# Altium PCB 88E1512_1000M_SFP_1027.PcbDoc (part 1 of 2)
Units mm, origin at the board's own origin, x right, y up, seen from the top; angles counter-clockwise.
Board outline 50 x 100 mm, 2 copper layers (Top Layer, Bottom Layer); 170 components, 153 nets, 597 pads, 463 vias.
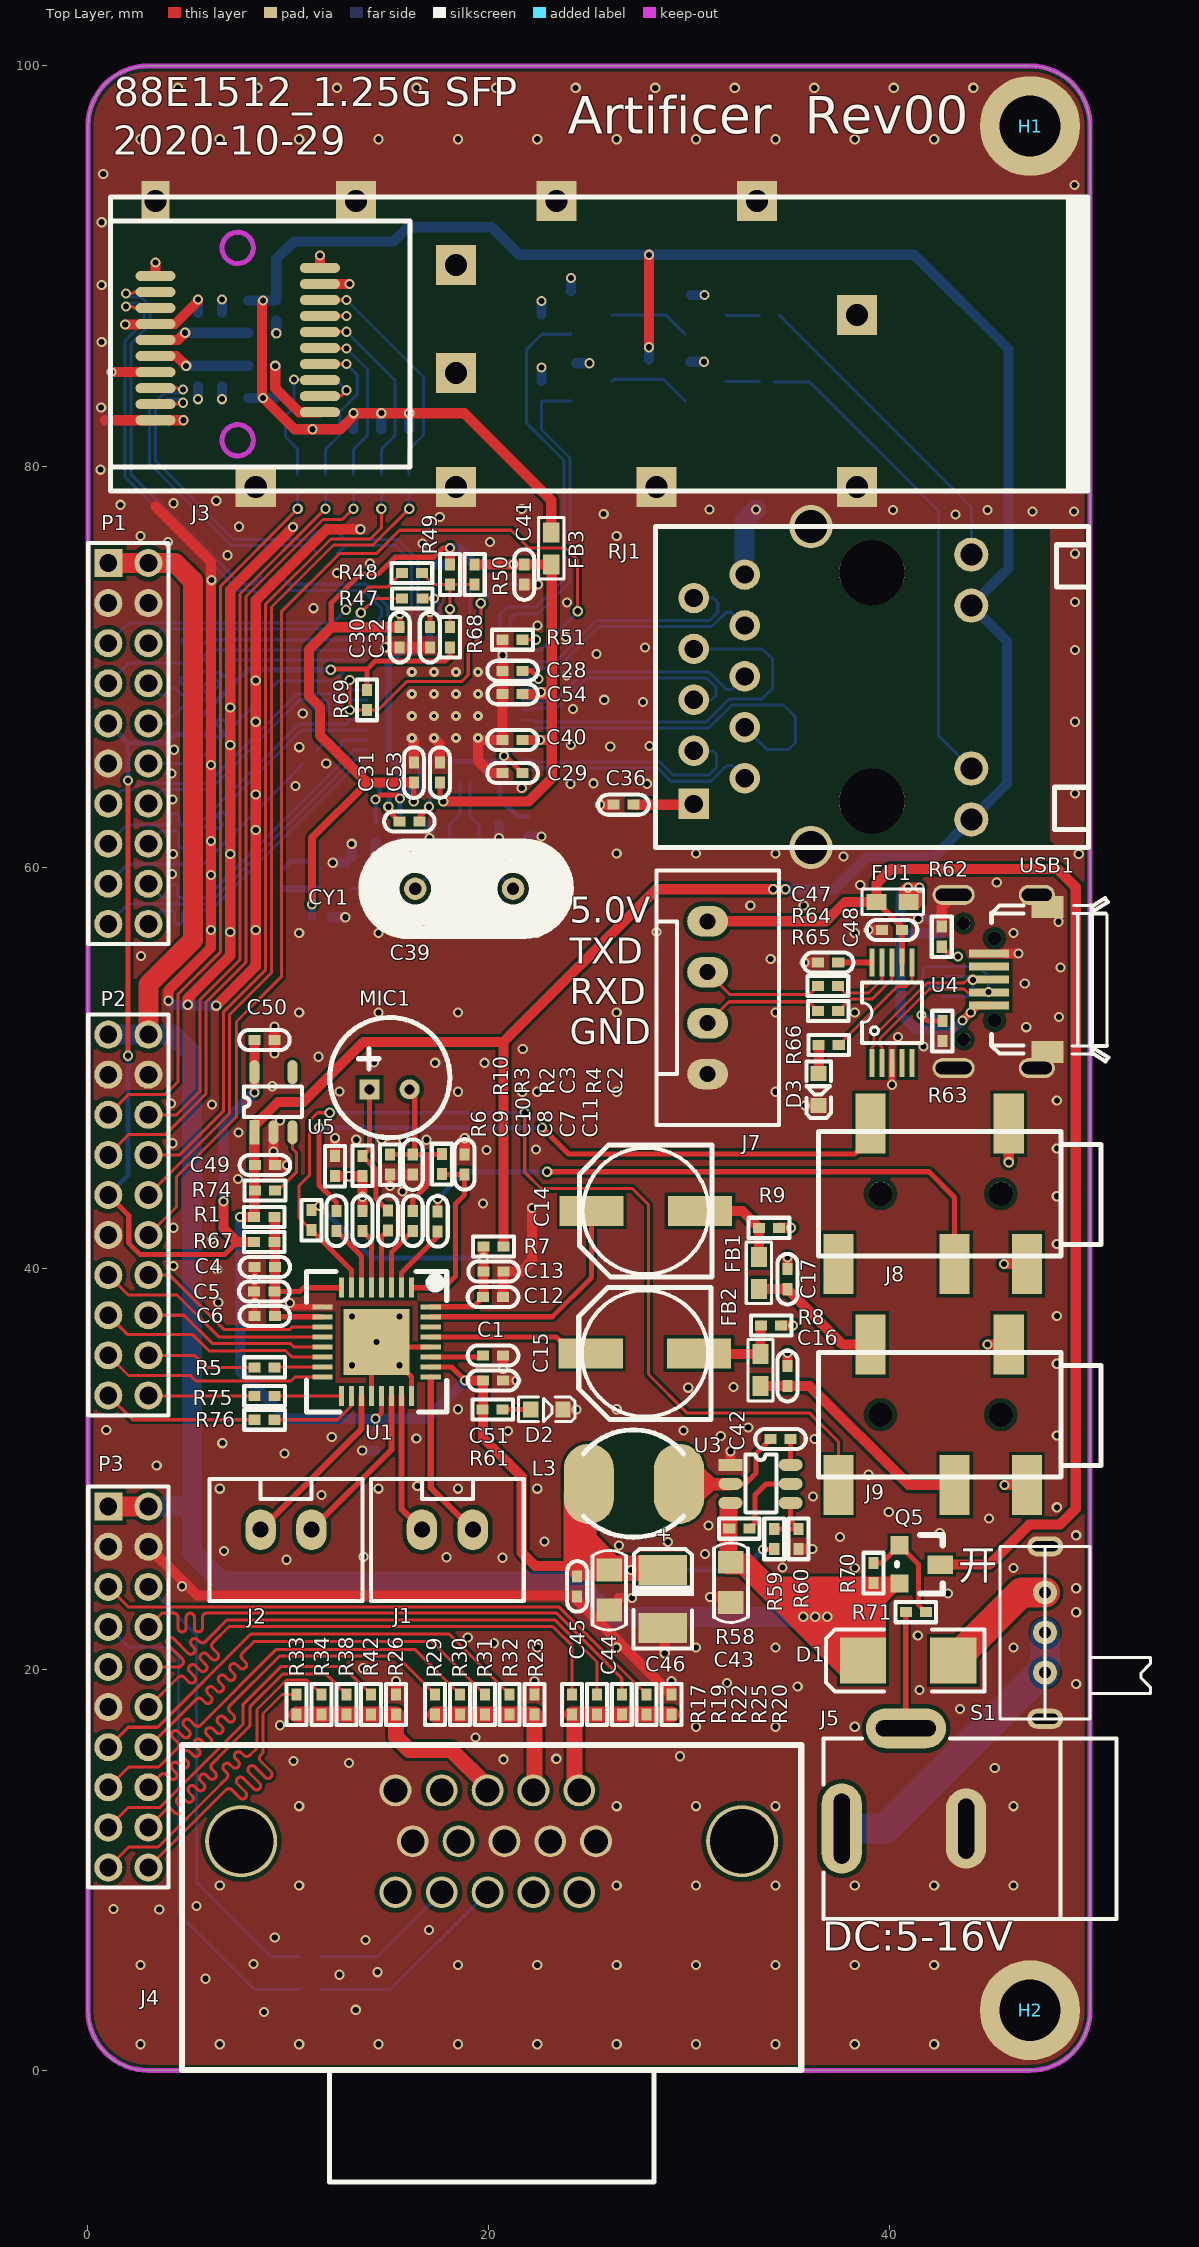
[diagram p0: Top Layer view]
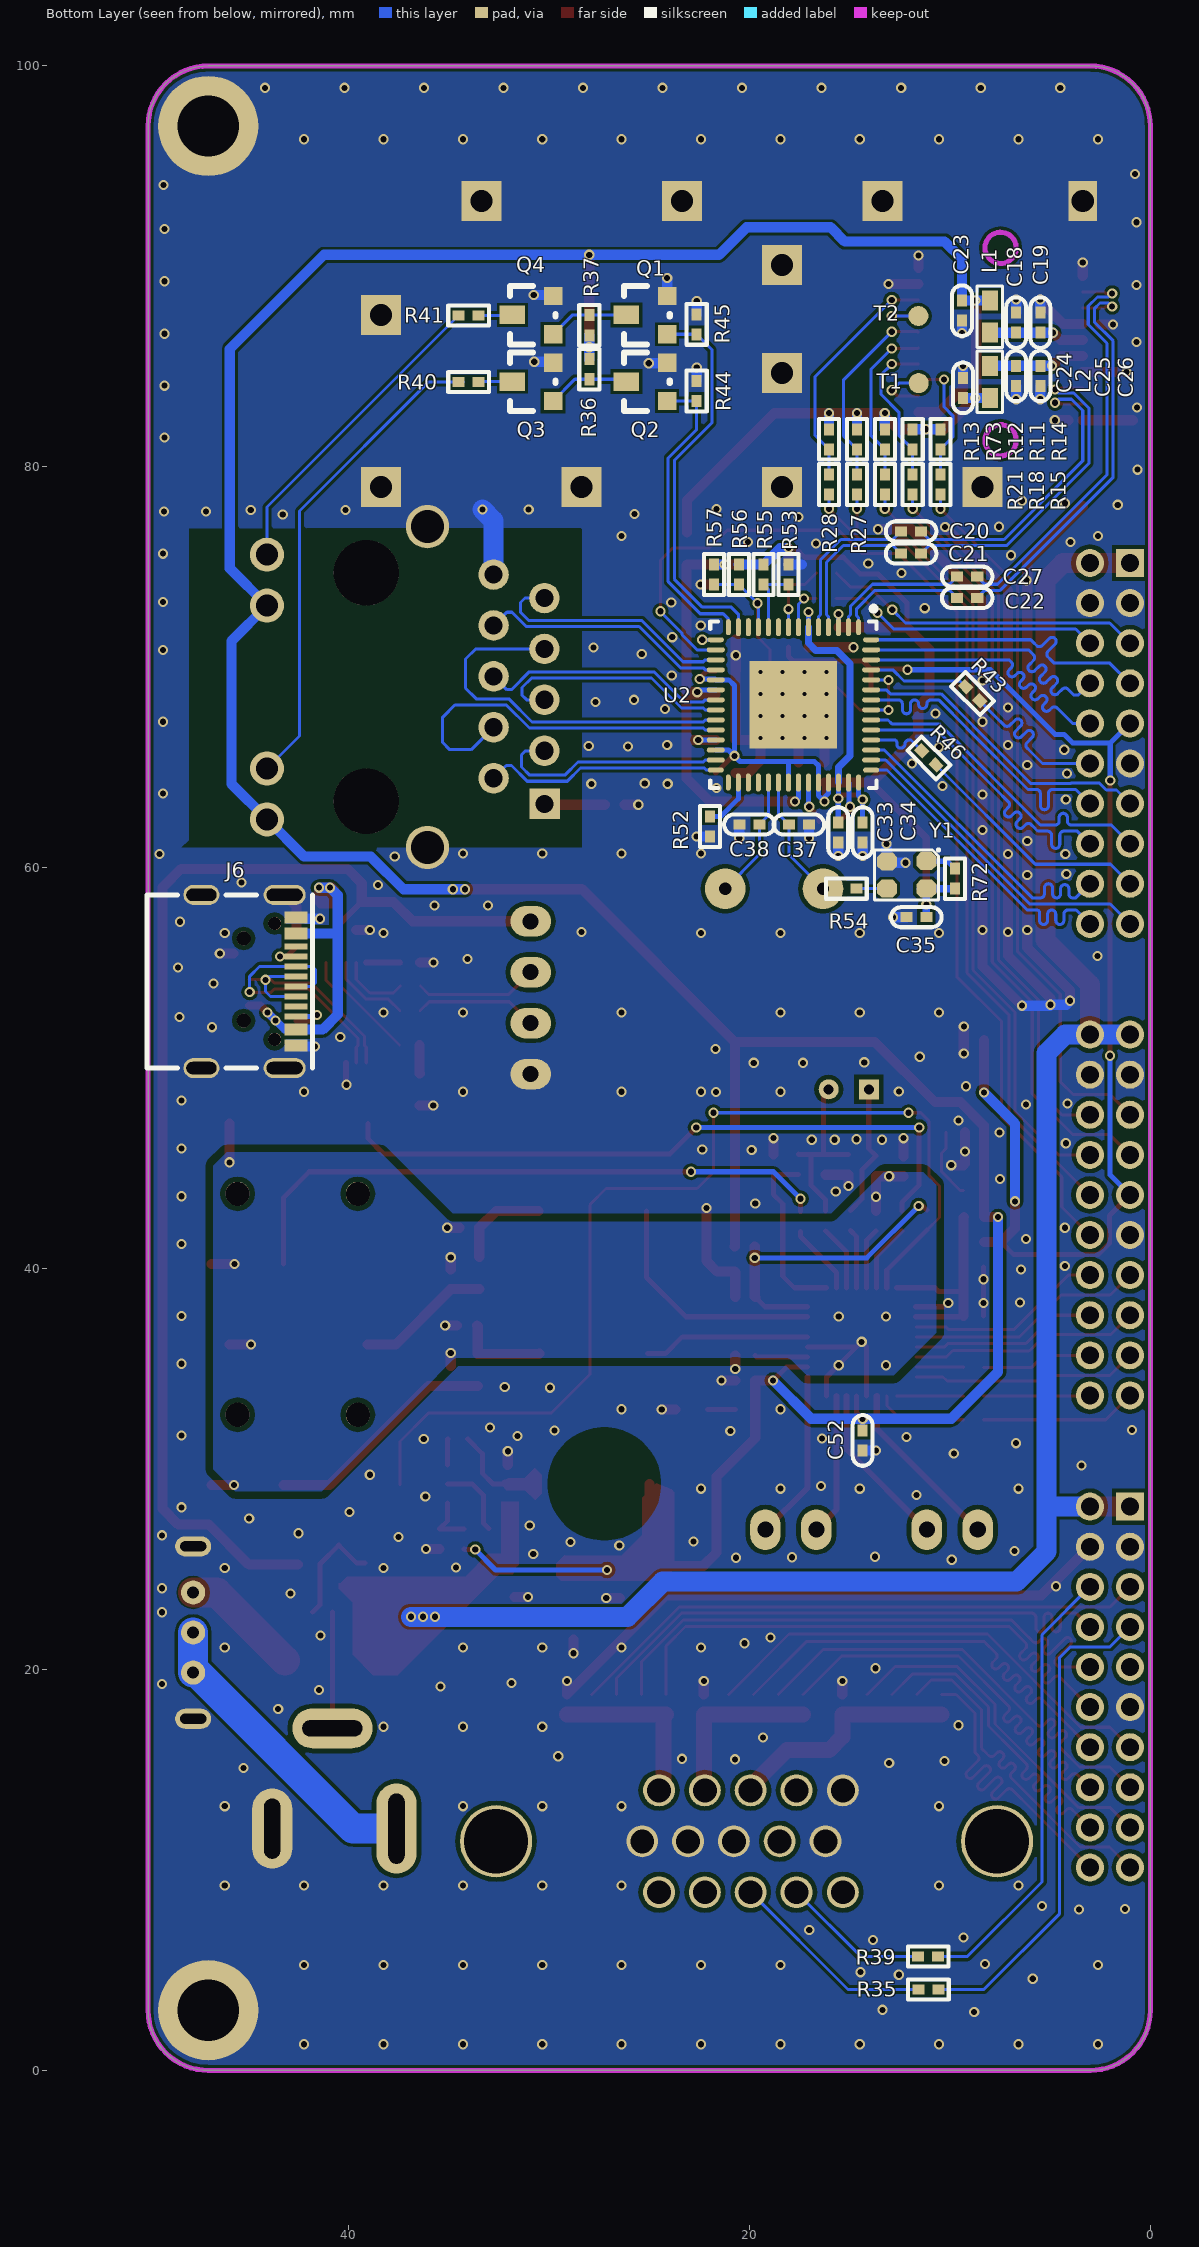
[diagram p1: Bottom Layer view, seen from below]
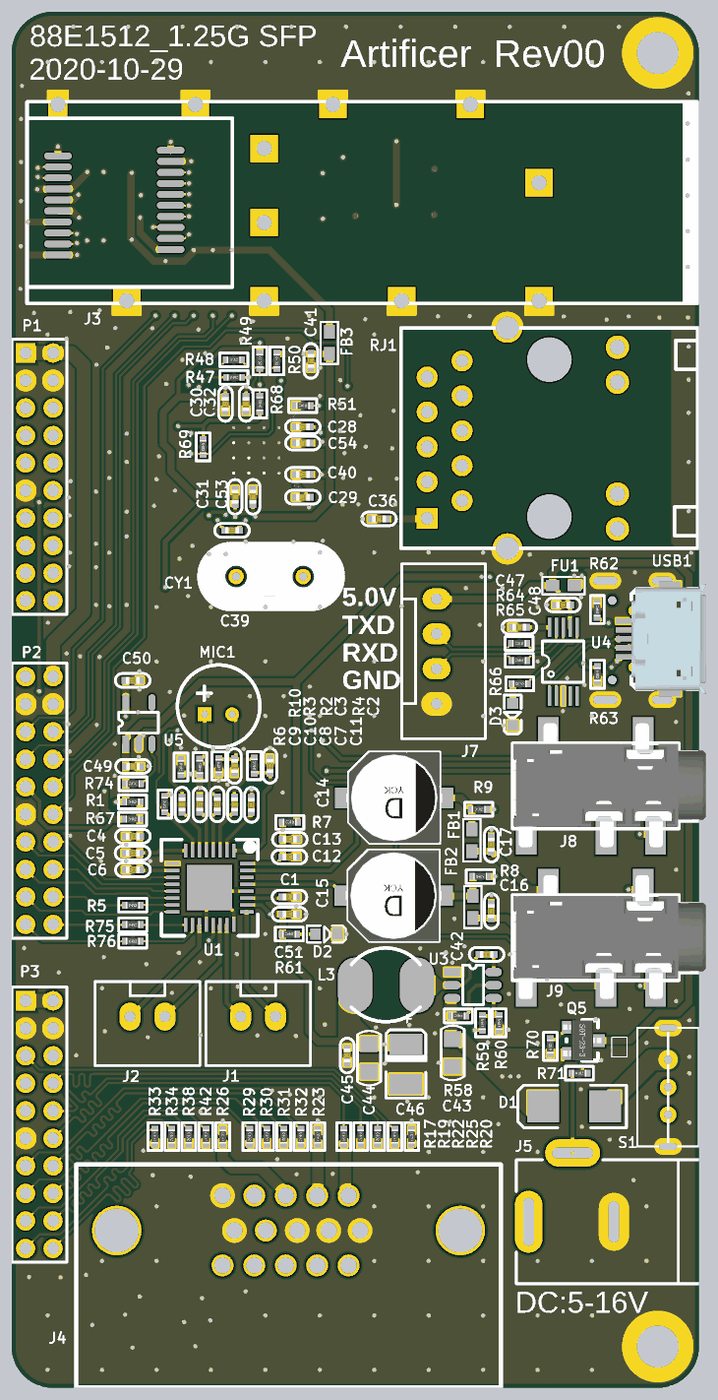
[diagram p3: 3D render of the assembled board from above, using the file's embedded part models]
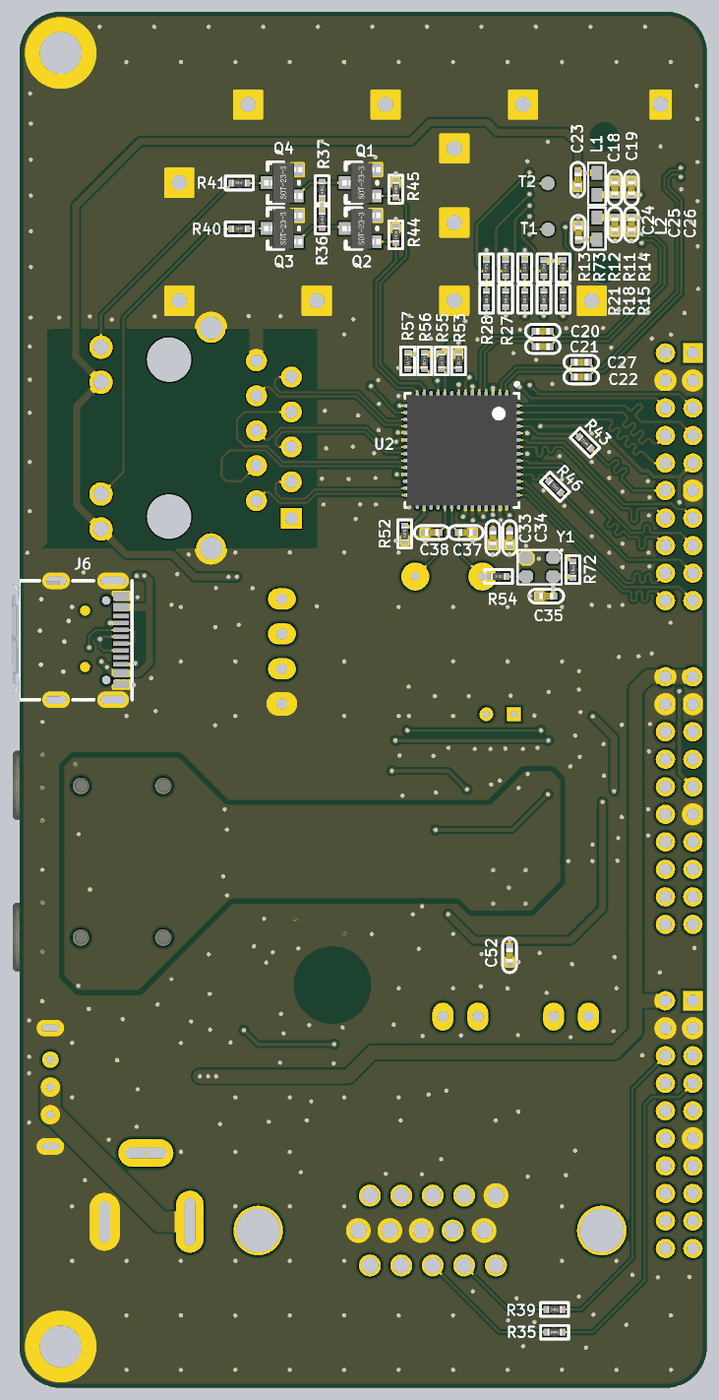
[diagram p4: 3D render of the assembled board from below, using the file's embedded part models]

## Layer stack, top to bottom
Top Solder: solder mask 0.0102, Solder Resist, Dk 3.5
Top Layer: signal copper 0.0356
Dielectric 1: dielectric 0.32, FR-4, Dk 4.8
Bottom Layer: signal copper 0.0356
Bottom Solder: solder mask 0.0102, Solder Resist, Dk 3.5

## Board outline
0,3 ccw(c3,3) 3,0 47,0 ccw(c47,3) 50,3 50,97 ccw(c47,97) 47,100 3,100 ccw(c3,97) 0,97

## Design rules (kind name [scope] priority, off if disabled: settings)
Clearance [All] p1: gap=0.152 except(0.22: THPad-Poly; 0.381: Poly-Poly)
ComponentClearance [All] p1 off: gap=0.254 collisioncheckmode=3 verticalgap=0.254 showdistances=FALSE
DiffPairsRouting [All] p1: maxlimit=0.152 minlimit=0.152 mostfreqgap=0.152 toplayer_minwidth=0.152 toplayer_maxwidth=0.152 toplayer_prefwidth=0.152 bottomlayer_minwidth=0.152 bottomlayer_maxwidth=0.152 bottomlayer_prefwidth=0.152 maxuncoupledlength=12.7
HoleSize [All] p1: absolutevalues=TRUE maxlimit=3.5 minlimit=0.025 maxpercent=80.000 minpercent=20.000
HoleToHoleClearance [All] p1: gap=0.152 allowstackedmicrovias=TRUE
MinimumSolderMaskSliver [All] p1 off: minsoldermaskwidth=0.254
PolygonConnect PolygonConnect_GND [IsVia or InNet('GND')] p1: connectstyle=Direct reliefconductorwidth=0.254 reliefentries=4 polygonreliefangle="90 Angle" airgapwidth=0.254
PolygonConnect [All] p2: connectstyle=Relief reliefconductorwidth=0.254 reliefentries=4 polygonreliefangle="90 Angle" airgapwidth=0.254
RoutingVias [All] p1: holewidth=0.305 width=0.508 viastyle="Through Hole" minholewidth=0.305 minwidth=0.508 maxholewidth=0.711 maxwidth=1.27
SilkToSilkClearance [All] p1 off: silktosilkclearance=0.254
SilkToSolderMaskClearance [IsPad] p1 off: minsilkscreentomaskgap=0.254 clearancetoexposedcopper=TRUE
SolderMaskExpansion [All] p1: expansion=0.102
Width [All] p1: maxlimit=3 minlimit=0.152 preferedwidth=0.152
23 further rules are at their usual default settings.

## Classes and differential pairs
net class eth_rxdata: ETH_RX_CLK ETH_RX_CTRL ETH_RXD0 ETH_RXD1 ETH_RXD2 ETH_RXD3
net class eth_txdata: ETH_TX_CLK ETH_TX_CTRL ETH_TXD0 ETH_TXD1 ETH_TXD2 ETH_TXD3
component class Power: C42 C43 C44 C45 C46 C47 C48 C49 C50 D1 D2 D3 FU1 H1 H2 J5 J6 J7 L3 Q5 R58 R59 R60 R61 R62 R63 R64 R65 R66 R70 R71 R74 S1 U3 U4 U5 USB1
component class 88E1512_1000M_SFP: C1 C2 C3 C4 C5 C6 C7 C8 C9 C10 C11 C12 C13 C14 C15 C16 C17 C18 C19 C20 C21 C22 C23 C24 C25 C26 C27 C28 C29 C30 C31 C32 C33 C34 C35 C36 C37 C38 C39 C40 C41 C51 C52 C53 C54 CY1 FB1 FB2 FB3 J1 J2 J3 J4 J8 J9 L1 L2 LINE_IN? MIC1 P1 P2 P3 Q1 Q2 Q3 Q4 R1 R2 R3 R4 R5 R6 R7 R8 R9 R10 R11 R12 R13 R14 R15 R17 R18 R19 R20 R21 R22 R23 R25 R26 R27 R28 R29 R30 R31 R32 R33 R34 R35 R36 R37 R38 R39 R40 R41 R42 R43 R44 R45 R46 R47 R48 R49 R50 R51 R52 R53 R54 R55 R56 R57 R67 R68 R69 R72 R73 R75 R76 RJ1 T1 T2 U1 U2 Y1
net class vga_r: VGA_R1 VGA_R2 VGA_R3 VGA_R4
net class vga_g: VGA_G1 VGA_G2 VGA_G3 VGA_G4
net class vga_b: VGA_B1 VGA_B2 VGA_B3 VGA_B4
differential pair USB_UART: +USB_UART_P -USB_UART_N
differential pair S_OUT: +S_OUT_P -S_OUT_N
differential pair S_IN: +S_IN_P -S_IN_N
differential pair ETH_MD4: +ETH_MD4_P -ETH_MD4_N
differential pair ETH_MD3: +ETH_MD3_P -ETH_MD3_N
differential pair ETH_MD2: +ETH_MD2_P -ETH_MD2_N
differential pair ETH_MD1: +ETH_MD1_P -ETH_MD1_N
differential pair SIN: +SIN_P -SIN_N
differential pair SOUT: +SOUT_P -SOUT_N

## Components (designator, comment, footprint, x,y, rotation, side; value= is the part's Value field where it differs from the comment)
C1 "CC41-0603-22pF" 0402C 20.21,35.662 r0 top
C2 "CC41-0603-22pF" 0402C 18.796,45.204 r90 top
C3 "CC41-0603-22pF" 0402C 16.205,45.187 r270 top
C4 "10uF" 0402C 8.822,40.081 r0 top
C5 "CC41-0603-22pF" 0402C 8.796,38.862 r0 top
C6 "CC41-0603-22pF" 0402C 8.822,37.643 r0 top
C7 "CC41-0603-22pF" 0402C 16.205,42.385 r270 top
C8 "CC41-0603-22pF" 0402C 14.961,42.401 r270 top
C9 "CC41-0603-22pF" 0402C 12.395,42.385 r270 top
C10 "CC41-0603-22pF" 0402C 13.691,42.385 r270 top
C11 "CC41-0603-22pF" 0402C 17.45,42.359 r270 top
C12 "CC41-0603-22pF" 0402C 20.21,38.583 r180 top
C13 "CC41-0603-22pF" 0402C 20.236,39.853 r180 top
C14 "220uF" "CM D(6.3*5.4)" 27.831,42.875 r180 top
C15 "220uF" "CM D(6.3*5.4)" 27.788,35.763 r180 top
C16 "CC41-0603-22pF" 0402C 34.9,34.638 r270 top
C17 "CC41-0603-22pF" 0402C 34.9,39.472 r270 top
C18 "CC41-0603-22pF" 0402C 6.694,87.19 r270 bottom
C19 "CC41-0603-22pF" 0402C 5.491,87.19 r270 bottom
C20 "10nF" 0402C 11.938,76.784 r180 bottom
C21 "10nF" 0402C 11.938,75.667 r180 bottom
C22 "10nF" 0402C 9.136,73.457 r180 bottom
C23 "CC41-0603-22pF" 0402C 9.398,87.79 r90 bottom
C24 "CC41-0603-22pF" 0402C 9.347,83.939 r270 bottom
C25 "CC41-0603-22pF" 0402C 6.694,84.539 r90 bottom
C26 "CC41-0603-22pF" 0402C 5.491,84.539 r90 bottom
C27 "10nF" 0402C 9.136,74.524 r180 bottom
C28 "CC41-0603-22pF" 0402C 21.184,69.825 r0 top
C29 "CC41-0603-22pF" 0402C 21.184,64.719 r0 top
C30 "CC41-0603-22pF" 0402C 15.555,71.498 r90 top
C31 "CC41-0603-22pF" 0402C 16.256,64.745 r270 top
C32 "CC41-0603-22pF" 0402C 17.055,71.498 r90 top
C33 "CC41-0603-22pF" 0402C 15.57,61.755 r90 bottom
C34 "CC41-0603-22pF" 0402C 14.351,61.755 r90 bottom
C35 "CC41-0603-22pF" 0402C 11.676,57.531 r0 bottom
C36 "CC41-0603-22pF" 0402C 26.721,63.144 r180 top
C37 "CC41-0603-22pF" 0402C 17.534,62.154 r0 bottom
C38 "CC41-0603-22pF" 0402C 20.007,62.154 r180 bottom
C39 "CC41-0603-22pF" 0402C 16.035,62.306 r180 top
C40 "CC41-0603-22pF" 0402C 21.18,66.373 r0 top
C41 "CC41-0603-22pF" 0402C 21.768,74.625 r90 top
C42 "0.1uF" 0402C 34.552,31.496 r180 top
C43 "22uF" 0805C 32.08,25.349 r270 top
C44 "22uF" 0805C 26.01,24.968 r270 top
C45 "0.1uF" 0402C 24.409,24.147 r90 top
C46 "100uF/6.3V" 3528C 28.677,22.073 r90 top
C47 "0.1uF/16V" 0402C 36.932,55.27 r180 top
C48 "0.1uF/16V" 0402C 40.115,56.896 r0 top
C49 "10uF/6.3V" 0402C 8.831,45.161 r0 top
C50 "1uF/6.3V" 0402C 8.806,51.41 r0 top
C51 "CC41-0603-22pF" 0402C 20.21,34.417 r180 top
C52 "CC41-0603-22pF" 0402C 14.351,31.428 r90 bottom
C53 "CC41-0603-22pF" 0402C 17.555,64.748 r270 top
C54 "CC41-0603-22pF" 0402C 21.192,68.656 r0 top
CY1 "25MHz" HC-49S 21.234,58.928 r180 top locked
D1 "SS34" SMB 40.919,20.447 r180 top
D2 "LED_R" LED-0603 22.098,32.999 r0 top
D3 "LED_R" LED-0603 36.479,49.733 r270 top
FB1 "120R" 0603R 33.477,40.589 r270 top
FB2 "120R" 0603R 33.553,35.738 r270 top
FB3 "120R_3A" 0603R 23.114,75.133 r90 top
FU1 "5V/1A" 0603 40.945,58.293 r180 top
H1 "Hose" HOSE 47,97 r0 top locked
H2 "Hose" HOSE 47,3 r0 top locked
J1 "XH-2P" DG1282 21.742,36.119 r180 top
J2 "XH-2P" DG1282 13.691,36.119 r180 top
J3 "1.25G_SFP_1X1" 1.25G_SFP_1X1 38.372,78.994 r180 top locked
J4 "VGA" VGA 20.142,11.43 r0 top locked
J5 "PWR2.5" pw2.5 51.308,12.065 r180 top
J6 "TYPE-C16PIN" USB-C-SMD_TYPE-C16PIN 44.976,54.325 r270 bottom locked
J7 "XH-4P" DG1284 31.42,59.868 r270 top
J8 "PJ-327A" PJ327A 48.538,43.734 r180 top
J9 "PJ-327A" PJ327A 48.538,32.71 r180 top
L1 "1.2uH" 0603R 8.001,88.29 r270 bottom
L2 "1.2uH" 0603R 8.001,83.439 r90 bottom
L3 "4.7uH/2A" CD54 25.053,29.353 r0 top
MIC1 "MIC" MIC-6022 14.046,48.946 r0 top
P1 "HERDER 10X2" HDR2X10_2.0#1 1.016,75.2 r270 top locked
P2 "HERDER 10X2" HDR2X10_2.0#2 1.016,51.675 r270 top locked
P3 "HERDER 10X2" HDR2X10_2.0#1 1.016,28.125 r270 top locked
Q1 "AO3400" SOT23 25.121,87.566 r90 bottom
Q2 "AO3400" SOT23 25.121,84.239 r90 bottom
Q3 "AO3400" SOT23 30.81,84.239 r90 bottom
Q4 "AO3400" SOT23 30.81,87.566 r90 bottom
Q5 "AO3400" SOT23 41.504,25.248 r270 top
R1 "NC_33R" 0402R 8.796,42.57 r180 top
R2 "47K" 0402R 15.062,45.187 r90 top
R3 "0R" 0402R 13.691,45.128 r270 top
R4 "680R" 0402R 17.653,45.212 r270 top
R5 "33R" 0402R 8.814,35.077 r180 top
R6 "47K" 0402R 11.151,42.418 r90 top
R7 "33R" 0402R 20.236,41.097 r0 top
R8 "10K" 0402R 34.087,37.16 r180 top
R9 "10K" 0402R 33.977,42.037 r180 top
R10 "0R" 0402R 12.319,45.11 r90 top
R11 "10K" 0402R 11.855,81.374 r90 bottom
R12 "10K" 0402R 13.246,81.374 r90 bottom
R13 "10K" 0402R 16.027,81.374 r90 bottom
R14 "10K" 0402R 10.465,81.374 r90 bottom
R15 "33R" 0402R 10.465,79.121 r270 bottom
R17 "4K_1%" 0402R 24.155,18.255 r90 top
R18 "33R" 0402R 11.855,79.121 r270 bottom
R19 "2K_1%" 0402R 25.394,18.255 r90 top
R20 "75R_1%" 0402R 29.108,18.255 r270 top
R21 "33R" 0402R 13.246,79.121 r270 bottom
R22 "1K_1%" 0402R 26.632,18.255 r90 top
R23 "75R_1%" 0402R 22.276,18.255 r270 top
R25 "510R_1%" 0402R 27.87,18.255 r90 top
R26 "75R_1%" 0402R 15.367,18.255 r270 top
R27 "33R" 0402R 14.637,79.121 r270 bottom
R28 "33R" 0402R 16.027,79.121 r270 bottom
R29 "4K_1%" 0402R 17.323,18.255 r90 top
R30 "2K_1%" 0402R 18.561,18.255 r90 top
R31 "1K_1%" 0402R 19.799,18.255 r90 top
R32 "510R_1%" 0402R 21.038,18.255 r90 top
R33 "4K_1%" 0402R 10.414,18.255 r90 top
R34 "2K_1%" 0402R 11.652,18.255 r90 top
R35 "100R_1%" 0402R 11.074,4.039 r0 bottom
R36 "1K" 0402R 27.991,84.869 r90 bottom
R37 "1K" 0402R 27.991,87.063 r270 bottom
R38 "1K_1%" 0402R 12.89,18.255 r90 top
R39 "100R_1%" 0402R 11.082,5.69 r0 bottom
R40 "470R" 0402R 34.011,84.226 r180 bottom
R41 "470R" 0402R 34.011,87.554 r180 bottom
R42 "510R_1%" 0402R 14.129,18.255 r90 top
R43 "33R" 0402R 8.865,68.682 r225 bottom
R44 "1K" 0402R 22.631,83.787 r270 bottom
R45 "1K" 0402R 22.631,87.105 r270 bottom
R46 "33R" 0402R 11.049,65.481 r225 bottom
R47 "33R" 0402R 16.18,73.431 r180 top
R48 "33R" 0402R 16.162,74.701 r180 top
R49 "NC_4.99K_1%" 0402R 18.059,74.625 r90 top
R50 "NC_4.99K_1%" 0402R 19.296,74.625 r90 top
R51 "0R" 0402R 21.18,71.373 r0 top
R52 "4.99K_1%" 0402R 21.971,62.06 r90 bottom
R53 "0R" 0402R 18.059,74.625 r90 bottom
R54 "NC_40.2R_1%" 0402R 15.164,58.953 r0 bottom
R55 "NC_0R" 0402R 19.296,74.625 r90 bottom
R56 "NC_0R" 0402R 20.532,74.625 r90 bottom
R57 "NC_0R" 0402R 21.768,74.625 r90 bottom
R58 "100K" 0402R 32.495,27.026 r0 top
R59 "62.5K_1%" 0402R 34.239,26.518 r90 top
R60 "20K_1%" 0402R 35.458,26.518 r90 top
R61 "470R" 0402R 20.193,32.969 r0 top
R62 "4.7K/5%" 0402R 42.596,56.558 r270 top
R63 "4.7K/5%" 0402R 42.621,51.849 r90 top
R64 "33R/5%" 0402R 36.914,54.102 r0 top
R65 "33R/5%" 0402R 36.932,52.857 r0 top
R66 "2K/5%" 0402R 36.957,51.156 r0 top
R67 "33R" 0402R 8.796,41.326 r180 top
R68 "4.99K_1%" 0402R 18.055,71.498 r270 top
R69 "0R" 0402R 13.93,68.373 r90 top
R70 "100K/5%" 0402R 39.192,24.808 r270 top
R71 "0R/5%" 0402R 41.3,22.86 r180 top
R72 "NC_22K" 0402R 9.754,59.453 r270 bottom
R73 "10K" 0402R 14.637,81.374 r90 bottom
R74 "100K/5%" 0402R 8.831,43.891 r0 top
R75 "33R" 0402R 8.814,33.655 r180 top
R76 "33R" 0402R 8.814,32.461 r180 top
RJ1 "HR911130A" RJ45-TH_HR911130A 37.144,69.014 r270 top locked
S1 "SW_SK12D07VG4" SW_SK12D07VG3 50.002,17.544 r90 top
T1 "TEST" TEST 11.557,84.176 r270 bottom
T2 "TEST" TEST 11.572,87.524 r270 bottom
U1 "WM8960" QFN32_W8960 14.402,36.347 r270 top
U2 "88E1512-XX-NNP2" 88E1512_QFN56 17.805,68.123 r270 bottom locked
U3 "JW5033S" SOT-23-6 32.055,30.211 r0 top
U4 "CH340E" MSOP10 40.005,52.807 r90 top locked
U5 "SPX3819M5-L-2-5" SOT-23-5 8.304,46.752 r90 top
USB1 "USB5PIN" MICROUSB 46.554,54.425 r270 top locked
Y1 "NC_25MHz_1.8V" 3225 10.566,60.884 r0 bottom

## Footprints (in the part's own frame and the unit in brackets; to place one, negate y for a bottom-side part, rotate by r counter-clockwise, add the part's x,y. Pads: shape width x height; smd on the part's side, far side on the other; paste and mask are expansions set on the pad)
1.25G_SFP_1X1 [mm]
  rect 2x2 hole 1.1: 0(0,0) 0(0,-8.58) 0(5,-14.26) 0(10,0) 0(15,-14.26) 0(20,-11.07) 0(20,-5.68) 0(20,0) 0(25,-14.26) 0(30,0)
  rect 1.4x2 hole 1.1: 0(35,-14.26)
  oval 2x0.5 smd: 1(26.8,-3.73) 2(26.8,-4.53) 3(26.8,-5.33) 4(26.8,-6.13) 5(26.8,-6.93) 6(26.8,-7.73) 7(26.8,-8.53) 8(26.8,-9.33) 9(26.8,-10.13) 10(26.8,-10.93) 11(35,-10.53) 12(35,-9.73) 13(35,-8.93) 14(35,-8.13) 15(35,-7.33) 16(35,-6.53) 17(35,-5.73) 18(35,-4.93) 19(35,-4.13) 20(35,-3.33)
  Keep-Out Layer circle w0.254: c30.9,-2.33 r0.78
  Keep-Out Layer circle w0.254: c30.9,-11.93 r0.78
  silkscreen extent -11.5,-14.55 37.25,0.2
88E1512_QFN56 [mm] "QFN, 56-Leads, Body 8.00x8.00mm, Pitch 0.50mm, Thermal Pad 4.37x4.37mm, IPC Medium Density"
  oval 0.8x0.25 smd: 1(-3.875,3.25) 14(-3.875,-3.25) 29(3.875,-3.25) 42(3.875,3.25)
  oval 0.9x0.25 smd: 2(-3.875,2.75) 3(-3.875,2.25) 4(-3.875,1.75) 5(-3.875,1.25) 6(-3.875,0.75) 7(-3.875,0.25) 8(-3.875,-0.25) 9(-3.875,-0.75) 10(-3.875,-1.25) 11(-3.875,-1.75) 12(-3.875,-2.25) 13(-3.875,-2.75) 30(3.875,-2.75) 31(3.875,-2.25) 32(3.875,-1.75) 33(3.875,-1.25) 34(3.875,-0.75) 35(3.875,-0.25) 36(3.875,0.25) 37(3.875,0.75) 38(3.875,1.25) 39(3.875,1.75) 40(3.875,2.25) 41(3.875,2.75)
  oval 0.25x0.8 smd: 15(-3.25,-3.875) 28(3.25,-3.875) 43(3.25,3.875) 56(-3.25,3.875)
  oval 0.25x0.9 smd: 16(-2.75,-3.875) 17(-2.25,-3.875) 18(-1.75,-3.875) 19(-1.25,-3.875) 20(-0.75,-3.875) 21(-0.25,-3.875) 22(0.25,-3.875) 23(0.75,-3.875) 24(1.25,-3.875) 25(1.75,-3.875) 26(2.25,-3.875) 27(2.75,-3.875) 44(2.75,3.875) 45(2.25,3.875) 46(1.75,3.875) 47(1.25,3.875) 48(0.75,3.875) 49(0.25,3.875) 50(-0.25,3.875) 51(-0.75,3.875) 52(-1.25,3.875) 53(-1.75,3.875) 54(-2.25,3.875) 55(-2.75,3.875)
  rect 4.37x4.37 smd: 57(0,0)
  silkscreen extent -4.92,-4.15 4.15,4.15, body extent -4.02,-4.02 4.02,4.02, height 0.85
0402C [mm]
  rect 0.6x0.5 smd: 1(-0.5,0) 2(0.5,0)
  silkscreen extent -1.26,-0.5 1.26,0.5, body extent -0.5,-0.25 0.5,0.25, height 0.5
0402R [mm]
  rect 0.6x0.5 smd: 1(-0.5,0) 2(0.5,0)
  silkscreen extent -1.02,-0.5 1.02,0.5, body extent -0.5,-0.25 0.5,0.25, height 0.35
0603 [mm]
  rect 1x0.8 smd: 1(0,0) 2(1.6,0)
  silkscreen extent -0.74,-0.64 2.34,0.64
0603R [mm]
  rect 1x0.8 smd: 1(0,0) 2(1.6,0)
  silkscreen extent -0.74,-0.64 2.34,0.64
0805C [mm]
  rect 1.14x1.27 smd: 1(0,0) 2(2,0)
  silkscreen extent -0.97,-0.84 3,0.84
3225 [mm]
  oct 1x0.9 smd: 1(0.61,0.559) 2(2.565,0.584) 3(2.565,1.93) 4(0.61,1.93)
  silkscreen extent -0.06,-0.06 3.2,2.5
3528C [mm]
  rect 1.5x2.4 smd: 1(2.9,0) 2(0,0)
  silkscreen extent -1.02,-1.55 3.94,1.52
CD54 [mm]
  oval 2.5x4 smd: 1(-0.063,-0.092) 2(4.437,-0.092)
  Top Layer pour cut-out: 5.009,-0.092 5.009,0.092 4.96,0.459 4.865,0.817 4.723,1.158 4.538,1.479 4.313,1.772 4.051,2.034 3.758,2.259 3.438,2.444 3.096,2.585 2.738,2.681 2.372,2.729 2.187,2.729 2.002,2.729 1.635,2.681 1.278,2.585 0.936,2.444 0.616,2.259 0.322,2.034 0.061,1.772 -0.164,1.479 -0.349,1.158 -0.491,0.817 -0.587,0.459 -0.635,0.092 -0.635,-0.092 -0.635,-0.277 -0.587,-0.644 -0.491,-1.001 -0.349,-1.343 -0.164,-1.664 0.061,-1.957 0.322,-2.219 0.616,-2.444 0.936,-2.629 1.278,-2.77 1.635,-2.866 2.002,-2.914 2.187,-2.914 2.372,-2.914 2.738,-2.866 3.096,-2.77 3.438,-2.629 3.758,-2.444 4.051,-2.219 4.313,-1.957 4.538,-1.664 4.723,-1.343 4.865,-1.001 4.96,-0.644 5.009,-0.277 5.009,-0.092
  Bottom Layer pour cut-out: 5.009,-0.092 5.009,0.092 4.96,0.459 4.865,0.817 4.723,1.158 4.538,1.479 4.313,1.772 4.051,2.034 3.758,2.259 3.438,2.444 3.096,2.585 2.738,2.681 2.372,2.729 2.187,2.729 2.002,2.729 1.635,2.681 1.278,2.585 0.936,2.444 0.616,2.259 0.322,2.034 0.061,1.772 -0.164,1.479 -0.349,1.158 -0.491,0.817 -0.587,0.459 -0.635,0.092 -0.635,-0.092 -0.635,-0.277 -0.587,-0.644 -0.491,-1.001 -0.349,-1.343 -0.164,-1.664 0.061,-1.957 0.322,-2.219 0.616,-2.444 0.936,-2.629 1.278,-2.77 1.635,-2.866 2.002,-2.914 2.187,-2.914 2.372,-2.914 2.738,-2.866 3.096,-2.77 3.438,-2.629 3.758,-2.444 4.051,-2.219 4.313,-1.957 4.538,-1.664 4.723,-1.343 4.865,-1.001 4.96,-0.644 5.009,-0.277 5.009,-0.092
  silkscreen extent -0.34,-2.76 4.67,2.61
"CM D(6.3*5.4)" [mm]
  rect 3.2x1.5 smd: 1(2.7,0) 2(-2.7,0)
  silkscreen extent -3.3,-3.3 3.3,3.3, body extent -3.5,-3.3 3.5,3.3, height 5.4
DG1282 [mil]
  oval 60x80 hole 31.5: 1(100,360) 2(200,360)
  silkscreen extent 0,260 300,500
DG1284 [mil]
  oval 60x80 hole 31.5: 1(100,-20) 2(200,-20) 3(300,-20) 4(400,-20)
  silkscreen extent 0,-120 500,120
HC-49S [mil]
  round 44 / inner round 100 / far side round 80 hole 24: 1(1,-1) 2(193,-1)
  silkscreen extent -115,-96 301,94
HDR2X10_2.0#1 [mm]
  rect 1.4x1.4 hole 0.889: 1(0,0)
  round 1.4 hole 0.889: 2(0,2) 3(2,0) 4(2,2) 5(4,0) 6(4,2) 7(6,0) 8(6,2) 9(8,0) 10(8,2) 11(10,0) 12(10,2) 13(12,0) 14(12,2) 15(14,0) 16(14,2) 17(16,0) 18(16,2) 19(18,0) 20(18,2)
  silkscreen extent -1,-1 19,3
HDR2X10_2.0#2 [mm]
  round 1.4 hole 0.889: 1(0,0) 2(0,2) 3(2,0) 4(2,2) 5(4,0) 6(4,2) 7(6,0) 8(6,2) 9(8,0) 10(8,2) 11(10,0) 12(10,2) 13(12,0) 14(12,2) 15(14,0) 16(14,2) 17(16,0) 18(16,2) 19(18,0) 20(18,2)
  silkscreen extent -1,-1 19,3
HOSE [mm]
  round 5 hole 3.048: 1(0,0)
LED-0603 [mil]
  rect 30x31.5 smd: 1(0,-1.19) 2(63,-1.19)
  silkscreen extent -24,-25 87,23
MIC-6022 [mm]
  rect 1x1 hole 0.5: 1(0,0)
  round 1 hole 0.5: 2(2,0)
  silkscreen extent -1.98,-2.41 4.01,3.58
MICROUSB [mm]
  round 0.7 hole 0.7: 0(-2.05,-1.325) 0(2.05,-1.325)
  rect 0.4x2 smd: 1(1.3,-1.6) 2(0.65,-1.6) 3(0,-1.6) 4(-0.65,-1.6) 5(-1.3,-1.6)
  rect 1.1x1.6 smd: 6(-3.625,1.325) 7(3.625,1.325)
  silkscreen extent -4.06,-1.48 4.09,4.36, body extent -4,-1.67 4,3.96, height 2.7
MSOP10 [mm]
  rect 1.4x0.25 smd: 1(-2.54,0.889) 2(-2.54,0.389) 3(-2.54,-0.111) 4(-2.54,-0.611) 5(-2.54,-1.111) 6(2.46,-1.111) 7(2.46,-0.611) 8(2.46,-0.111) 9(2.46,0.389) 10(2.46,0.889)
  silkscreen extent -1.54,-1.61 1.46,1.39
PJ327A [mm]
  round 1.2 hole 1.2 unplated: 0(3,0) 0(9,0)
  rect 1.5x3 smd: 2(9.5,-3.5) 3(2.6,-3.5) 4(1.7,3.5) 5(5.3,3.5) 6(11.1,3.5)
  silkscreen extent -2,-3.1 12.1,3.1, body extent -1.95,-4.55 12.1,4.45, height 4.8
pw2.5 [mm]
  oval 2x4.5 hole 0.8 slot 3.5 at 90 deg: 1(13.7,0)
  oval 2x4 hole 0.8 slot 3 at 90 deg: 2(7.5,0)
  oval 4x2 hole 0.8 slot 3 at 0 deg: 3(10.5,-5)
  silkscreen extent 0,-4.5 14.6,4.5
QFN32_W8960 [mm]
  rect 1x0.25 smd: 1(-2.7,1.75) 2(-2.7,1.25) 3(-2.7,0.75) 4(-2.7,0.25) 5(-2.7,-0.25) 6(-2.7,-0.75) 7(-2.7,-1.25) 8(-2.7,-1.75) 17(2.7,-1.75) 18(2.7,-1.25) 19(2.7,-0.75) 20(2.7,-0.25) 21(2.7,0.25) 22(2.7,0.75) 23(2.7,1.25) 24(2.7,1.75)
  rect 0.25x1 smd: 9(-1.75,-2.7) 10(-1.25,-2.7) 11(-0.75,-2.7) 12(-0.25,-2.7) 13(0.25,-2.7) 14(0.75,-2.7) 15(1.25,-2.7) 16(1.75,-2.7) 25(1.75,2.7) 26(1.25,2.7) 27(0.75,2.7) 28(0.25,2.7) 29(-0.25,2.7) 30(-0.75,2.7) 31(-1.25,2.7) 32(-1.75,2.7)
  rect 3.3x3.3 smd: 33(0,0)
  silkscreen extent -3.5,-3.5 3.5,3.5
RJ45-TH_HR911130A [mil]
  round 66.93 hole 43.31: 11(260,272.62) 12(160,272.62) 13(-160,272.62) 14(-260,272.62)
  rect 60x60 hole 35.83: P1(229.63,-272.62)
  round 60 hole 35.83: P2(179.1,-172.38) P3(125.2,-272.38) P4(79.1,-172.38) P5(25.2,-272.38) P6(-20.9,-172.38) P7(-74.8,-272.38) P8(-120.9,-172.38) P9(-174.8,-272.38) P10(-220.9,-172.38)
  round 85 hole 65: SHIELD0(-315,-42.48) SHIELD1(315,-42.48)
  round 127.95 hole 127.95 unplated: ""(-224.4,77.62) ""(224.4,77.62)
  silkscreen extent -315,-347 315,503
SMB [mm] "DO-214-AA/SMB; 2 C-Bend Leads; Body 5.3 x 3.6 mm, inc. leads (LxW)"
  rect 2.3x2.3 smd: 1(-2.25,0) 2(2.25,0)
  silkscreen extent -3.8,-1.55 4.1,1.55
SOT23 [mil]
  rect 36x36 smd: 1(-37.5,-40) 2(37.5,-40)
  rect 36x50 smd: 3(0.5,40)
  silkscreen extent -58,-45 58,45, body extent -57,-55 57,55, height 47
SOT-23-5 [mm]
  rect 1.2x0.5 smd: 1(0.051,0)
  oval 1.2x0.5 smd: 2(0.051,-0.95) 3(0.051,-1.9) 4(3.051,-1.9) 5(3.051,0)
  silkscreen extent 0.81,-2.38 2.34,0.51
SOT-23-6 [mm]
  rect 1.2x0.6 smd: 1(0,0)
  oval 1.2x0.6 smd: 2(0,-0.95) 3(0,-1.9) 4(3,-1.9) 5(3,-0.95) 6(3,0)
  silkscreen extent 0.76,-2.38 2.29,0.51
SW_SK12D07VG3 [mm]
  oval 1x1.8 hole 0.5 slot 1.3 at 90 deg: 0(0,2.25) 0(8.6,2.25)
  round 1.2 hole 0.6: 1(2.3,2.25) 2(4.3,2.25) 3(6.3,2.25)
  silkscreen extent 0,-3 8.6,4.5
TEST [mm]
  round 1 smd: 1(0,0)
USB-C-SMD_TYPE-C16PIN [mm]
  oval 1x2.099 hole 0.61 slot 1.8 at 90 deg: 1(-4.32,1.787) 2(4.32,1.787)
  oval 1x1.799 hole 0.61 slot 1.5 at 90 deg: 3(-4.32,-2.363) 4(4.32,-2.363)
  rect 0.6x1.15 smd: A1B12(-3.2,2.362) A4B9(-2.4,2.362) B1A12(3.2,2.362) B4A9(2.4,2.362)
  rect 0.3x1.15 smd: A5(-1.25,2.362) A6(-0.25,2.362) A7(0.25,2.362) A8(-1.75,2.362) B5(1.75,2.362) B6(0.75,2.362) B7(-0.75,2.362) B8(1.25,2.362)
  round 0.65 hole 0.65 unplated: ""(-2.89,1.288) ""(2.89,1.288)
  silkscreen extent -4.32,-5.08 4.32,3.17
VGA [mil]
  round 141.7 hole 126: 0(-492,0) 0(492,0)
  round 62.7 hole 47: 1(172,100) 2(82,100) 3(-8,100) 4(-98,100) 5(-189,100) 6(205,0) 7(115,0) 8(25,0) 9(-65,0) 10(-155,0) 11(172,-100) 12(82,-100) 13(-8,-100) 14(-98,-100) 15(-189,-100)
  silkscreen extent -608,-669 608,189

## Part data
C1 C2 C3 C5 C6 C7 C8 C9 C10 C11 C12 C13 C16 C17 C18 C19 C23 C24 C25 C26 C28 C29 C30 C31 C32 C33 C34 C35 C36 C37 C38 C39 C40 C41 C51 C52 C53 C54: "NPO贴片电容"
C4 C20 C21 C22 C27: library part CC41-0603-22pF, "NPO贴片电容"
C14 C15: library part C-CM, "贴片电解电容"
C42 C43 C44 C45 C47 C48 C49 C50: library part CAP, "Capacitor"
C46: library part "Cap Pol2", "插件电解电容"
CY1: library part CRYES
D1: library part DIODE_VZ
D2 D3: library part LED
FB1 FB2 FB3 L1 L2: library part L-4.7uH-4D28
FU1: library part FB-90R-100Mhz
J1 J2: library part CON2
J5: "Low Voltage Power Supply Connector"
J7: library part CON4
L3: library part L-4.7uH-1206
Q1 Q2 Q3 Q4: library part MOS-N
Q5: library part MOS-P
R1 R2 R3 R4 R5 R6 R7 R8 R9 R10 R11 R12 R13 R14 R15 R17 R18 R19 R20 R21 R22 R23 R25 R26 R27 R28 R29 R30 R31 R32 R33 R34 R35 R36 R37 R38 R39 R40 R41 R42 R43 R44 R45 R46 R47 R48 R49 R50 R51 R52 R53 R54 R55 R56 R57 R58 R59 R60 R61 R62 R63 R64 R65 R66 R67 R68 R69 R70 R71 R72 R73 R74 R75 R76: library part RES1
U5: library part SPX3819M5
USB1: library part USB-5PIN
Y1: library part 32.768KHz_3.3V, "3225 3.3V"

## Via types
v1: diameter 0.508, hole 0.305, Top Layer to Bottom Layer, tented both sides, 447 vias
v2: diameter 0.5, hole 0.2, Top Layer to Bottom Layer, tented both sides, 16 vias

## Nets (pads, with @x,y where several pads share a name; then routed paths per layer and width w, separated by ;. In a path a pad name is that pad's centre, name@x,y a point inside that pad or via, vN(x,y) a via of type N, cw(c..) or ccw(c..) an arc to the next point about the centre after c; other vN are vias at no path point)
AGND: C10.1 C16.1 C17.1 J8.3 J8.4 J9.3 J9.4 R3.2 R8.1 R9.1 R10.1 U1.20 U1.24 U1.28 U1.33 | length 19.5
  Top Layer w0.254: U1.20@14.152,33.647 14.152,36.097 v1(14.402,36.347) U1.33@14.652,36.097 ; U1.24@16.152,33.647 16.152,34.597 U1.33@14.652,36.097 ; U1.28@17.102,36.097 U1.33@14.652,36.097
  Top Layer w0.508: R10.1@12.319,44.61 v1(13.03,44.61) R3.2@13.673,44.61 ; C10.1@13.691,42.885 v1(13.691,43.586) 13.691,44.593 R3.2@13.673,44.61 ; R3.2@13.691,44.628 R3.2@13.673,44.61 ; R9.1@34.477,42.037 v1(35.077,42.037) ; R8.1@34.587,37.16 v1(35.179,37.16) ; C16.1@34.9,35.138 v1(34.9,35.789) ; C17.1@34.9,39.972 v1(34.9,40.564) ; v1(44.871,36.21) J9.3@45.938,36.21 ; v1(45.695,40.234) J8.4@46.838,40.234 ; v1(45.72,29.21) J9.4@46.838,29.21 ; v1(45.938,45.303) J8.3@45.938,47.234
  other v1: 13.183,35.179 15.545,35.179 13.183,37.617 15.545,37.617
AUD_ADCDAT: P2.17 U1.16 | length 11.3
  Top Layer w0.152: P2.17@1.016,35.675 2.02,34.671 5.105,34.671 5.385,34.392 10.135,34.392 10.34,34.597 U1.16@11.702,34.597
AUD_ADCLRC: P2.18 R5.2 | length 5.5
  Top Layer w0.152: P2.18@3.016,35.675 5.321,35.675 5.918,35.077 R5.2@8.314,35.077
AUD_BCLK: P2.13 U1.12 | length 12
  Top Layer w0.152: P2.13@1.016,39.675 2.007,38.684 4.445,38.684 6.532,36.597 U1.12@11.702,36.597
AUD_DACDAT: P2.15 U1.14 | length 11.6
  Top Layer w0.152: P2.15@1.016,37.675 1.988,36.703 5.232,36.703 6.045,35.89 7.569,35.89 7.595,35.916 9.855,35.916 10.173,35.597 U1.14@11.702,35.597
AUD_DACLRC: P2.16 U1.13 | length 9.3
  Top Layer w0.152: P2.16@3.016,37.675 4.794,37.675 6.198,36.271 10.084,36.271 10.258,36.097 U1.13@11.702,36.097
AUD_MCLK: P2.14 U1.11 | length 9.9
  Top Layer w0.152: P2.14@3.016,39.675 4.089,39.675 6.807,36.957 10.058,36.957 10.199,37.097 U1.11@11.702,37.097
AVCC_3.3V: C12.2 C13.2 R6.2 R7.1 U1.32 | length 15.1
  Top Layer w0.254: R6.2@11.151,42.918 11.362,43.129 v1(11.557,43.129) ; U1.32@17.102,38.097 19.225,38.097 C12.2@19.71,38.583
  Top Layer w0.508: C12.2@19.71,38.583 19.736,38.608 C13.2@19.736,39.853 v1(19.736,40.538) R7.1@19.736,41.097
  Bottom Layer w0.254: v1(11.557,43.129) 14.148,40.538 v1(19.736,40.538)
CLK_25M: C37.2 CY1.2 R54.2 U2.34 | length 6.2
  Bottom Layer w0.152: CY1.2@16.332,58.953 18.034,60.655 C37.2@18.034,62.154 18.555,62.675 U2.34@18.555,64.248
DC_CHEAK: J5.3 R71.2 | length 5.8
  Top Layer w0.254: R71.2@40.8,22.86 40.8,17.073 J5.3@40.808,17.065
DVCC: C4.2 C5.2 C6.2 R1.1 R67.1 U1.8 U1.10 | length 10.8
  Top Layer w0.254: C6.2@9.322,37.643 9.367,37.597 U1.10@11.702,37.597 ; C5.2@9.322,38.837 C5.2@9.296,38.862 9.322,38.862 10.566,38.862 10.752,39.047 U1.8@12.652,39.047
  Top Layer w0.508: R1.1@9.296,42.57 9.322,42.545 C4.2@9.322,40.081 9.322,38.862 9.322,38.837 C6.2@9.322,37.643
ETH_1.0V: C32.2 C33.2 C34.2 U2.6 U2.40 U2.42 | length 16.5
  Top Layer w0.254: v1(14.351,63.398) 14.58,63.627 15.392,63.627 v1(15.57,63.449) ; C32.2@17.055,71.998 v1(17.055,72.758)
  Bottom Layer w0.254: C34.2@14.351,62.255 v1(14.351,63.398) 14.555,63.603 U2.42@14.555,64.248 ; U2.40@15.555,64.248 15.555,63.439 v1@15.57,63.424 ; C33.2@15.57,62.255 v1@15.57,63.424 ; v1(15.57,63.449) v1@15.57,63.424 ; U2.6@17.055,71.998 v1(17.055,72.758)
  Bottom Layer w0.36: U2.40@15.555,64.248 15.555,65.013 14.986,65.583 14.986,70.18 15.646,70.841 16.688,70.841 17.055,71.208 U2.6@17.055,71.998
ETH_1.8V: C28.2 C29.2 C30.2 C31.2 C35.1 R49.2 R55.2 R56.2 R72.2 U2.3 U2.19 U2.26 U2.35 U2.38 U2.39 Y1.4 | length 56.9
  Top Layer w0.254: 12.141,71.998 12.141,73.203 13.589,74.651 14.478,74.651 15.316,75.489 17.247,75.489 17.704,75.946 v1(18.059,75.946) ; C30.2@15.555,71.998 v1(15.555,72.659) ; v1(16.256,63.297) C31.2@16.256,64.245 ; v1(20.752,65.583) 20.82,65.583 C29.2@21.684,64.719 ; C28.2@21.684,69.825 22.123,69.825 22.53,69.418 v1(22.479,69.418)
  Top Layer w0.381: v1(11.176,58.166) 11.176,61.493 13.927,64.245
  Top Layer w0.508: C30.2@15.555,71.998 12.141,71.998 11.024,70.88 11.024,68.58 11.582,68.021 11.582,66.589 13.927,64.245 C31.2@16.256,64.245 ; R49.2@18.059,75.125 v1(18.059,75.946)
  Bottom Layer w0.254: U2.3@15.555,71.998 v1(15.555,72.659) ; U2.39@16.055,64.248 16.055,63.718 16.256,63.517 v1(16.256,63.297) 16.555,63.596 U2.38@16.555,64.248 16.555,65.095 16.764,65.303 18.055,65.303 ; U2.35@18.055,64.248 18.055,65.303 ; U2.26@21.68,65.873 21.042,65.873 v1(20.752,65.583) ; v1(22.479,69.418) 21.726,69.418 U2.19@21.68,69.373 21.037,69.373 20.752,69.088 v1(20.752,65.583) ; 18.055,65.303 20.472,65.303 v1(20.752,65.583)
  Bottom Layer w0.381: R72.2@9.754,58.953 Y1.4@11.176,58.953 ; C35.1@11.176,57.531 v1(11.176,58.166) Y1.4@11.176,58.953 ; Y1.4@11.481,58.953 Y1.4@11.176,58.953
  Bottom Layer w0.508: v1(18.059,75.946) 18.475,75.946 R55.2@19.296,75.125 R56.2@20.532,75.125
ETH_3.3V: C40.2 C41.2 C53.2 C54.2 FB3.1 R50.2 R57.2 U2.20 U2.25 U2.36 | length 28.3
  Top Layer w0.254: C53.2@17.555,64.248 17.555,63.471 v1(17.729,63.297)
  Top Layer w0.508: v1(17.729,63.297) 21.971,63.297 23.139,64.465 23.139,66.373 ; R50.2@19.296,75.125 v1(21.23,75.125) C41.2@21.768,75.125 21.776,75.133 FB3.1@23.114,75.133 23.139,75.108 23.139,68.58 ; C40.2@21.68,66.373 23.139,66.373 ; C54.2@21.692,68.656 23.063,68.656 ; v1(22.606,68.758) 22.961,68.758 23.063,68.656 ; 23.063,68.656 23.139,68.58 ; 23.139,66.373 23.139,68.58
  Bottom Layer w0.254: U2.36@17.555,64.248 17.555,63.471 v1(17.729,63.297) ; U2.25@21.68,66.373 22.553,66.373 v1(22.555,66.37) ; U2.20@21.68,68.873 22.543,68.873 22.606,68.81 v1(22.606,68.758)
  Bottom Layer w0.508: v1(21.23,75.125) R57.2@21.768,75.125
ETH_MD1_N: RJ1.P3 U2.27 | length 12
  Bottom Layer w0.152: U2.27@21.68,65.373 22.206,65.373 22.304,65.275 28.551,65.275 29.208,64.618 30.963,64.618 31.369,65.024 31.369,65.634 31.168,65.834 RJ1.P3@30.226,65.834
ETH_MD1_P: RJ1.P2 U2.28 | length 12
  Bottom Layer w0.152: U2.28@21.68,64.873 22.156,64.873 22.254,64.971 28.425,64.971 29.082,64.314 31.089,64.314 31.875,65.1 32.131,65.1 RJ1.P2@32.766,64.465
ETH_MD2_N: RJ1.P7 U2.23 | length 18.8
  Bottom Layer w0.152: U2.23@21.68,67.373 22.206,67.373 22.304,67.275 30.851,67.275 32.003,68.427 33.629,68.427 34.163,68.961 34.163,70.409 33.658,70.914 RJ1.P7@30.226,70.914
ETH_MD2_P: RJ1.P4 U2.24 | length 18.8
  Bottom Layer w0.152: U2.24@21.68,66.873 22.206,66.873 22.304,66.971 30.977,66.971 32.129,68.123 34.696,68.123 35.306,67.513 35.306,66.243 34.95,65.888 33.884,65.888 RJ1.P4@32.766,67.005
ETH_MD3_N: RJ1.P6 U2.21 | length 12.4
  Bottom Layer w0.152: U2.21@21.68,68.373 22.206,68.373 22.304,68.275 23.266,68.275 24.764,69.773 30.987,69.773 31.875,68.885 32.106,68.885 RJ1.P6@32.766,69.545
ETH_MD3_P: RJ1.P5 U2.22 | length 12.1
  Bottom Layer w0.152: U2.22@21.68,67.873 22.206,67.873 22.304,67.971 23.392,67.971 24.89,69.469 30.861,69.469 31.344,68.986 31.344,68.605 31.112,68.374 RJ1.P5@30.226,68.374
ETH_MD4_N: RJ1.P9 U2.17 | length 12.6
  Bottom Layer w0.152: U2.17@21.68,70.373 22.206,70.373 22.304,70.275 23.31,70.275 25.374,72.338 31.013,72.338 31.42,72.746 31.42,73.228 31.194,73.454 RJ1.P9@30.226,73.454
ETH_MD4_P: RJ1.P8 U2.18 | length 12.5
  Bottom Layer w0.152: U2.18@21.68,69.873 22.206,69.873 22.304,69.971 23.436,69.971 25.5,72.034 31.139,72.034 31.85,72.746 32.106,72.746 RJ1.P8@32.766,72.085
ETH_MDC: P1.6 R47.2 | length 13.6
  Top Layer w0.152: v1(13.614,72.72) 14.326,73.431 R47.2@15.68,73.431
  Bottom Layer w0.152: P1.6@3.016,71.2 3.724,71.908 12.802,71.908 v1(13.614,72.72)
ETH_MDIO: P1.5 R48.2 | length 16.1
  Top Layer w0.152: v1(12.878,72.873) 14.021,74.016 14.977,74.016 R48.2@15.662,74.701
  Bottom Layer w0.152: P1.5@1.016,71.2 2.028,72.212 12.217,72.212 v1(12.878,72.873)
ETH_RST_N: P2.12 U2.16 | length 57.1
  Top Layer w0.152: P2.12@3.016,41.675 4.42,43.079 4.42,44.577 7.417,47.574 7.417,52.324 9.652,54.559 9.652,72.771 12.548,75.667 14.376,75.667 15.545,76.835 21.107,76.835 21.996,75.946 23.825,75.946 24.435,75.336 v1(24.435,72.796)
  Bottom Layer w0.152: U2.16@21.68,70.873 22.613,70.873 23.369,71.629 23.369,71.701 24.435,72.767 v1(24.435,72.796)
ETH_RX_CLK: P1.17 R46.2 | length 12.1
  Bottom Layer w0.152: P1.17@1.016,59.2 1.989,60.173 5.74,60.173 R46.2@10.695,65.128
ETH_RX_CTRL: P1.20 U2.43 | length 16.3
  Bottom Layer w0.152: P1.20@3.016,57.2 3.703,57.887 3.906,57.887 4.109,57.887 cw(c4.109,57.684) 4.312,57.684 4.312,57.372 ccw(c4.515,57.372) 4.515,57.169 ccw(c4.515,57.372) 4.718,57.372 4.718,57.684 cw(c4.921,57.684) 4.921,57.887 cw(c4.921,57.684) 5.124,57.684 5.124,57.372 ccw(c5.327,57.372) 5.327,57.169 ccw(c5.327,57.372) 5.53,57.372 5.53,57.754 cw(c5.664,57.754) 5.664,57.887 6.148,57.887 13.133,64.873 U2.43@13.93,64.873
ETH_RXD0: P1.19 U2.44 | length 16.3
  Bottom Layer w0.152: P1.19@1.016,57.2 2.007,58.191 6.022,58.191 13.203,65.373 U2.44@13.93,65.373
ETH_RXD1: P1.18 U2.45 | length 16.3
  Bottom Layer w0.152: P1.18@3.016,59.2 3.721,58.495 3.866,58.495 ccw(c3.866,58.698) 4.069,58.698 4.069,58.954 cw(c4.272,58.954) 4.272,59.157 cw(c4.272,58.954) 4.475,58.954 4.475,58.698 ccw(c4.678,58.698) 4.678,58.495 ccw(c4.678,58.698) 4.881,58.698 4.881,58.998 cw(c5.084,58.998) 5.084,59.201 cw(c5.084,58.998) 5.287,58.998 5.287,58.698 ccw(c5.49,58.698) 5.49,58.495 5.693,58.495 5.896,58.495 13.273,65.873 U2.45@13.93,65.873
ETH_RXD2: P1.16 U2.47 | length 16.3
  Bottom Layer w0.152: P1.16@3.016,61.2 3.64,61.824 3.912,61.824 4.115,61.824 4.318,61.824 cw(c4.318,61.621) 4.521,61.621 4.521,61.167 ccw(c4.724,61.167) 4.724,60.964 ccw(c4.724,61.167) 4.927,61.167 4.927,61.621 cw(c5.13,61.621) 5.13,61.824 5.333,61.824 5.614,61.824 5.651,61.862 5.795,62.005 5.939,62.149 cw(c6.082,62.005) 6.226,62.149 6.356,62.018 ccw(c6.5,62.162) 6.643,62.018 ccw(c6.5,62.162) 6.643,62.306 6.513,62.436 cw(c6.656,62.579) 6.513,62.723 cw(c6.656,62.579) 6.8,62.723 6.93,62.593 ccw(c7.074,62.736) 7.217,62.593 ccw(c7.074,62.736) 7.217,62.88 7.087,63.01 cw(c7.23,63.154) 7.087,63.297 7.696,63.906 10.663,66.873 U2.47@13.93,66.873
ETH_RXD3: P1.15 U2.48 | length 16.3
  Bottom Layer w0.152: P1.15@1.016,61.2 1.944,62.128 2.057,62.128 3.735,62.128 3.938,62.128 ccw(c3.938,62.331) 4.141,62.331 4.141,62.514 cw(c4.344,62.514) 4.344,62.717 cw(c4.344,62.514) 4.547,62.514 4.547,62.331 ccw(c4.75,62.331) 4.75,62.128 4.953,62.128 5.156,62.128 5.488,62.128 10.537,67.177 12.897,67.177 13.093,67.373 U2.48@13.93,67.373
ETH_TX_CLK: P1.12 R43.2 | length 9.1
  Bottom Layer w0.152: P1.12@3.016,65.2 5.383,65.2 6.032,65.849 6.146,65.963 ccw(c6.003,66.107) 6.146,66.251 5.895,66.502 cw(c6.038,66.646) 5.895,66.789 cw(c6.038,66.646) 6.182,66.789 6.434,66.538 ccw(c6.577,66.681) 6.721,66.538 ccw(c6.577,66.681) 6.721,66.825 6.469,67.076 cw(c6.612,67.22) 6.469,67.364 cw(c6.612,67.22) 6.756,67.364 7.008,67.112 ccw(c7.151,67.255) 7.295,67.112 7.438,67.255 7.582,67.399 R43.2@8.511,68.328
ETH_TX_CTRL: P1.7 U2.56 | length 15.3
  Bottom Layer w0.152: P1.7@1.016,69.2 2.022,70.206 4.597,70.206 4.801,70.206 4.963,70.368 5.107,70.512 ccw(c4.963,70.655) 5.107,70.799 4.756,71.149 cw(c4.899,71.293) 4.756,71.436 cw(c4.899,71.293) 5.043,71.436 5.394,71.086 ccw(c5.537,71.229) 5.681,71.086 5.824,71.229 5.968,71.373 U2.56@13.93,71.373
ETH_TXD0: P1.14 U2.50 | length 16.3
  Bottom Layer w0.152: P1.14@3.016,63.2 3.723,63.907 4.394,63.907 4.675,63.907 4.878,63.907 cw(c4.878,63.704) 5.081,63.704 5.081,63.094 ccw(c5.284,63.094) 5.284,62.891 ccw(c5.284,63.094) 5.487,63.094 5.487,63.704 cw(c5.69,63.704) 5.69,63.907 6.105,63.907 9.156,66.959 9.156,66.969 10.561,68.373 10.949,68.373 cw(c10.949,68.17) 11.152,68.17 11.152,68.144 ccw(c11.355,68.144) 11.355,67.941 ccw(c11.355,68.144) 11.558,68.144 11.558,68.17 cw(c11.761,68.17) 11.761,68.373 cw(c11.761,68.17) 11.964,68.17 11.964,67.883 ccw(c12.167,67.883) 12.167,67.68 ccw(c12.167,67.883) 12.37,67.883 12.37,68.17 cw(c12.573,68.17) 12.573,68.373 U2.50@13.93,68.373
ETH_TXD1: P1.13 U2.51 | length 15.3
  Bottom Layer w0.152: P1.13@1.016,63.2 1.689,63.873 2.198,63.873 2.561,64.236 3.941,64.236 3.966,64.212 5.979,64.212 8.852,67.085 8.852,67.095 10.435,68.677 12.975,68.677 13.171,68.873 U2.51@13.93,68.873
ETH_TXD2: P1.10 U2.54 | length 15.3
  Bottom Layer w0.152: P1.10@3.016,67.2 3.878,67.2 4.356,67.678 4.5,67.822 4.643,67.965 cw(c4.787,67.822) 4.93,67.965 5.035,67.86 ccw(c5.179,68.004) 5.322,67.86 ccw(c5.179,68.004) 5.322,68.148 5.217,68.252 cw(c5.361,68.396) 5.217,68.54 cw(c5.361,68.396) 5.504,68.54 5.609,68.435 ccw(c5.753,68.578) 5.896,68.435 ccw(c5.753,68.578) 5.896,68.722 5.792,68.827 cw(c5.935,68.97) 5.792,69.114 cw(c5.935,68.97) 6.079,69.114 6.184,69.009 ccw(c6.327,69.152) 6.471,69.009 ccw(c6.327,69.152) 6.471,69.296 6.366,69.401 cw(c6.509,69.544) 6.366,69.688 cw(c6.509,69.544) 6.653,69.688 6.758,69.583 ccw(c6.901,69.727) 7.045,69.583 ccw(c6.901,69.727) 7.045,69.87 6.94,69.975 cw(c7.083,70.119) 6.94,70.262 7.051,70.373 U2.54@13.93,70.373
ETH_TXD3: P1.8 U2.55 | length 15.3
  Bottom Layer w0.152: P1.8@3.016,69.2 3.598,68.618 3.823,68.618 3.966,68.762 4.11,68.905 cw(c4.253,68.762) 4.397,68.905 4.613,68.689 ccw(c4.757,68.832) 4.901,68.689 ccw(c4.757,68.832) 4.901,68.976 4.684,69.192 cw(c4.828,69.336) 4.684,69.479 cw(c4.828,69.336) 4.971,69.479 5.188,69.263 ccw(c5.331,69.406) 5.475,69.263 ccw(c5.331,69.406) 5.475,69.55 5.258,69.766 cw(c5.402,69.91) 5.258,70.054 cw(c5.402,69.91) 5.545,70.054 5.762,69.837 ccw(c5.905,69.981) 6.049,69.837 ccw(c5.905,69.981) 6.049,70.124 5.832,70.341 cw(c5.976,70.484) 5.832,70.628 5.976,70.771 6.077,70.873 U2.55@13.93,70.873